# Allegro board CC1310LAUNCHPAD.brd
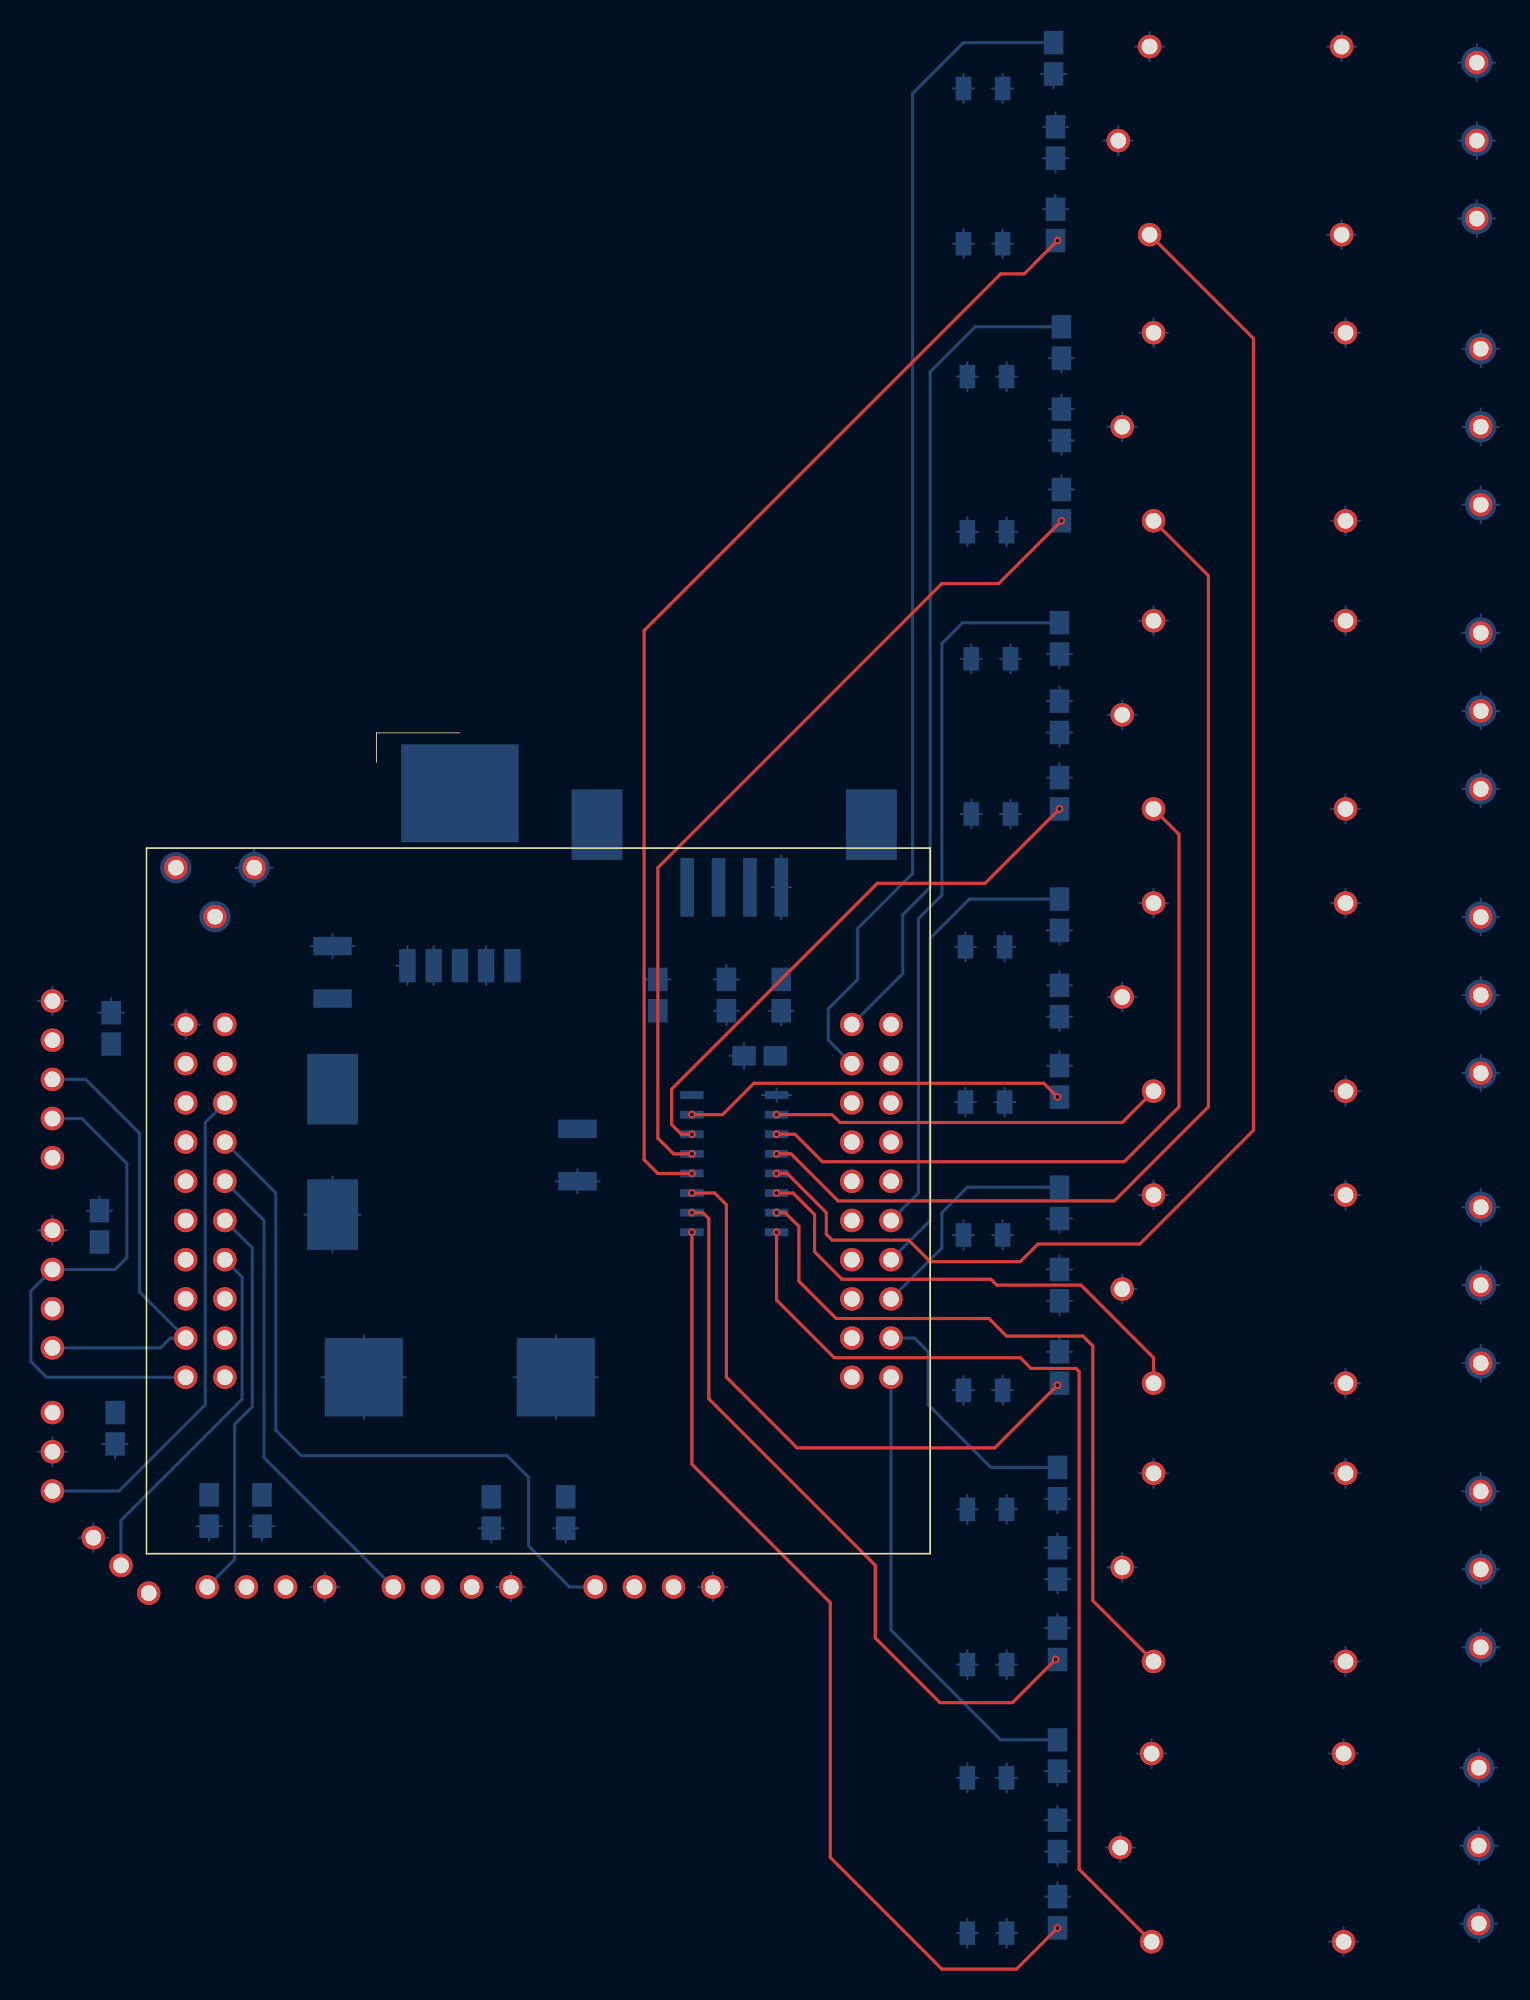
[diagram p0: board, top side]
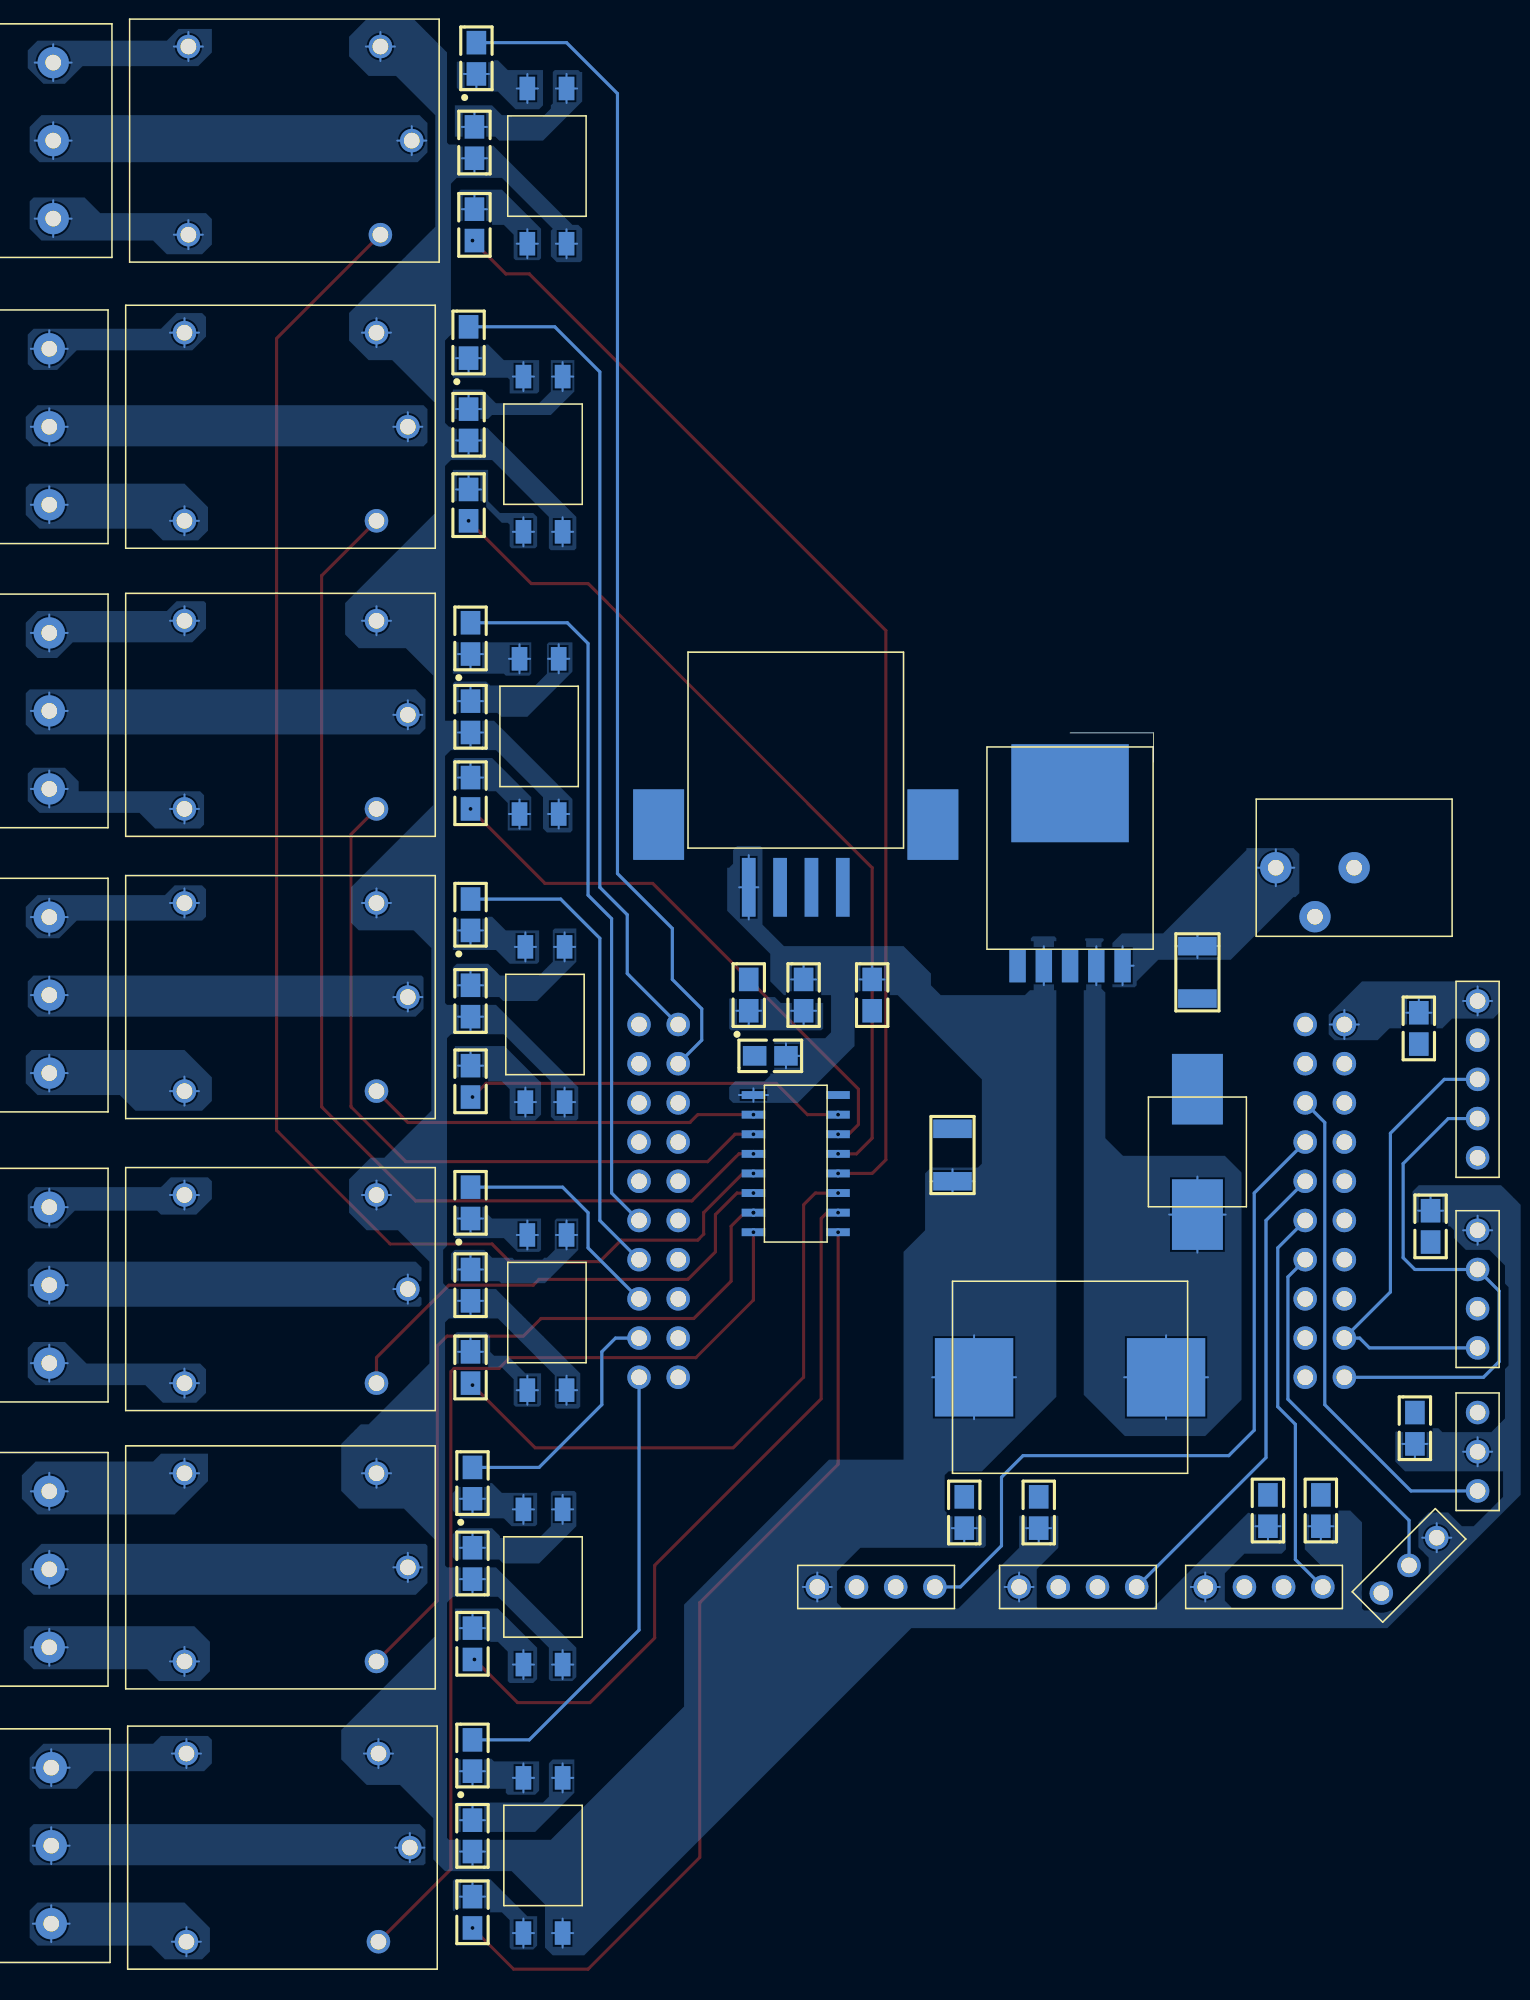
[diagram p1: board, bottom side, seen from below]

Outline 5.41 x 1.91 mm; copper layers: TOP, BOTTOM. Coordinates in mm from the lower left corner of the outline.

## Placement (name value [footprint] x y rotation side)
C1  0.1uF  [C0805]  -16.94 -43.15 180 bottom
C2  0.1uF  [C0805]  -17.96 -30.07 180 bottom
C3  10uF  [C0805]  18.24 -15.09 180 bottom
C4  0.1uF  [C0805]  -17.2 -17.25 180 bottom
C5  0.1uF  [C0805]  12.27 -48.62 0 bottom
C6  0.1uF  [C0805]  24.84 -19.02 90 bottom
C8  100uF  [C1210]  -2.84 -11.91 270 bottom
C9  100uF  [C1210]  13.03 -27.15 90 bottom
C10  0.1uF  [C0805]  -7.42 -48.49 0 bottom
C11  0.1uF  [C0805]  -10.85 -48.49 0 bottom
C12  0.1uF  [C0805]  7.44 -48.62 0 bottom
D1  LED  [D0805]  44.27 8.03 180 bottom
D5  LED  [D0805]  26.24 -15.09 180 bottom
D6  MBR360  [SS34]  -2.84 -25.25 270 bottom
D11  LED  [D0805]  44.27 -9.88 180 bottom
D12  LED  [D0805]  44.27 -28.55 180 bottom
D13  LED  [D0805]  44.15 -46.71 180 bottom
D14  LED  [D0805]  44.15 -64.36 180 bottom
D15  LED  [D0805]  44.4 27.2 180 bottom
D16  LED  [D0805]  43.89 45.62 180 bottom
J4  HEADER 3  [KF3013P]  71.45 -70.21 0 bottom
J5  HEADER 3  [KF3013P]  71.58 -52.3 0 bottom
J6  HEADER 3  [KF3013P]  71.58 -33.88 0 bottom
J7  HEADER 3  [KF3013P]  71.32 40.28 0 bottom
J8  HEADER 3  [KF3013P]  71.58 21.74 0 bottom
J10  HEADER 3  [KF3013P]  71.58 -15.09 0 bottom
J11  HEADER 3  [KF3013P]  71.58 3.33 0 bottom
L1  47uH  [RH127]  5.41 -39.85 0 bottom
LS1  RELAY SPDT  [HK33F]  56.46 -70.33 180 bottom
LS2  RELAY SPDT  [HK33F]  56.59 -52.17 180 bottom
LS3  RELAY SPDT  [HK33F]  56.59 -34.14 180 bottom
LS4  RELAY SPDT  [HK33F]  56.59 21.74 180 bottom
LS5  RELAY SPDT  [HK33F]  56.34 40.28 180 bottom
LS6  RELAY SPDT  [HK33F]  56.59 -15.21 180 bottom
LS7  RELAY SPDT  [HK33F]  56.59 3.07 180 bottom
R5  220 Ohm  [R0805]  22.68 -15.09 180 bottom
R12  1k Ohm  [R0805]  44.27 2.95 0 bottom
R13  1k Ohm  [R0805]  44.27 -15.47 0 bottom
R14  1k Ohm  [R0805]  44.27 -33.88 0 bottom
R15  1k Ohm  [R0805]  44.15 -51.92 0 bottom
R16  1k Ohm  [R0805]  44.15 -69.57 0 bottom
R17  1k Ohm  [R0805]  44.4 21.87 0 bottom
R18  1k Ohm  [R0805]  44.02 40.16 0 bottom
R20  1k Ohm  [R0805]  44.27 -2.01 180 bottom
R21  1k Ohm  [R0805]  44.27 -20.68 180 bottom
R22  1k Ohm  [R0805]  44.27 -39.22 180 bottom
R23  1k Ohm  [R0805]  44.15 -57.12 180 bottom
R24  1k Ohm  [R0805]  44.15 -74.52 180 bottom
R25  1k Ohm  [R0805]  44.4 16.66 180 bottom
R26  1k Ohm  [R0805]  44.02 34.82 180 bottom
U7  -  [ULN2003A]  23.19 -26.01 0 bottom
U8  -  [AM2320]  -21.01 -34.14 180 bottom
U9  bh1750  [BH1750]  -21.01 -20.55 180 bottom
U10  -  [LM393]  17.98 -53.44 90 bottom
U11  pH  [PH]  -21.01 -44.68 180 bottom
U12  CC1310LauchPad  [CC1310CONNECTOR]  10.49 -28.42 0 top
U13  LM2576HV-ADJ  [LM2576]  5.41 -5.56 270 bottom
U14  -  [LM393]  -7.16 -53.44 90 bottom
U15  -  [LM35]  -16.56 -52.04 225 bottom
U16  -  [LM393]  4.9 -53.44 90 bottom
U17  DC  [DC002POWER]  -13 -6.83 0 bottom
U18  -  [USB]  23.19 0.79 90 bottom
U21  PC817XxNiP0F  [PC817X2NIP0F]  39.83 1.68 270 bottom
U22  PC817XxNiP0F  [PC817X2NIP0F]  39.45 -16.99 270 bottom
U23  PC817XxNiP0F  [PC817X2NIP0F]  39.32 -35.66 270 bottom
U24  PC817XxNiP0F  [PC817X2NIP0F]  39.57 -53.44 270 bottom
U25  PC817XxNiP0F  [PC817X2NIP0F]  39.57 -70.84 270 bottom
U26  PC817XxNiP0F  [PC817X2NIP0F]  39.57 19.96 270 bottom
U27  PC817XxNiP0F  [PC817X2NIP0F]  39.32 38.63 270 bottom

## Library data of the parts
C1-C6 C10-C12 = CAP NP
C8 C9 = CAP POL
D1 D5 D11-D16 = LED
D6 = DIODE SCHOTTKY
J4-J8 J10 J11 = HEADER 3
L1 = INDUCTOR
LS1-LS7 = RELAY SPDT
R5 R12-R18 R20-R26 = RESISTOR
U7 = ULN2003A
U8 = AM2320
U9 = bh1750
U10 U14 U16 = LM393
U11 = pH
U12 = CC1310LaouchPad
U13 = LM2576HV-ADJ
U15 = LM35
U17 = DC002
U18 = USB
U21-U27 = PC817XxNiP0F

## Footprints (pads in the part's own frame, mm; a bottom-side part is the same pattern mirrored in y, then rotated)
AM2320
  round 1.524 hole 1.016: 1(0,3.81) 2(0,1.27) 3(0,-1.27) 4(0,-3.81)
BH1750
  round 1.524 hole 1.016: 1(0,5.08) 2(0,2.54) 3(0,0) 4(0,-2.54) 5(0,-5.08)
C0805
  rect 1.27x1.524 smd: 1(0,1.016) 2(0,-1.016)
C1210
  rect 1.2x2.5 smd: 1(0,0) 2(3.4,0)
CC1310CONNECTOR
  round 1.524 hole 1.016: 1(-22.86,11.43) 2(-22.86,8.89) 3(-22.86,6.35) 4(-22.86,3.81) 5(-22.86,1.27) 6(-22.86,-1.27) 7(-22.86,-3.81) 8(-22.86,-6.35) 9(-22.86,-8.89) 10(-22.86,-11.43) 11(22.86,-11.43) 12(22.86,-8.89) 13(22.86,-6.35) 14(22.86,-3.81) 15(22.86,-1.27) 16(22.86,1.27) 17(22.86,3.81) 18(22.86,6.35) 19(22.86,8.89) 20(22.86,11.43) 21(-20.32,11.43) 22(-20.32,8.89) 23(-20.32,6.35) 24(-20.32,3.81) 25(-20.32,1.27) 26(-20.32,-1.27) 27(-20.32,-3.81) 28(-20.32,-6.35) 29(-20.32,-8.89) 30(-20.32,-11.43) 31(20.32,-11.43) 32(20.32,-8.89) 33(20.32,-6.35) 34(20.32,-3.81) 35(20.32,-1.27) 36(20.32,1.27) 37(20.32,3.81) 38(20.32,6.35) 39(20.32,8.89) 40(20.32,11.43)
D0805
  rect 1.27x1.524 smd: 1(0,1.016) 2(0,-1.016)
DC002POWER
  round 1.524 hole 1.016: 3(0,0) 4(5.08,0) 5(2.54,3.175)
HK33F
  round 1.524 hole 1.016: 1(6.223,6.096) 2(6.223,-6.096) 3(8.255,0) 4(-6.223,6.096) 5(-6.223,-6.096)
KF3013P
  round 1.524 hole 1.016: 1(0,5.055) 2(0,0) 3(0,-5.055)
LM35
  round 1.524 hole 1.016: 1(0,2.54) 2(0,0) 3(0,-2.54)
LM393
  round 1.524 hole 1.016: 1(0,3.81) 2(0,1.27) 3(0,-1.27) 4(0,-3.81)
LM2576
  rect 6.35x7.62 smd: (-3.556,0)
  rect 2.159x1.067 smd: 1(7.62,3.404) 2(7.62,1.702) 3(7.62,0) 4(7.62,-1.702) 5(7.62,-3.404)
PC817X2NIP0F
  rect 1.524x1.016 smd: 1(-5.029,1.27) 2(-5.029,-1.27) 3(5.029,-1.27) 4(5.029,1.27)
PH
  round 1.524 hole 1.016: 1(0,2.54) 2(0,0) 3(0,-2.54)
R0805
  rect 1.27x1.524 smd: 1(0,1.016) 2(0,-1.016)
RH127
  rect 5.08x5.08 smd: 1(-6.223,0) 2(6.223,0)
SS34
  rect 4.572x3.302 smd: 1(-4.064,0) 2(4.064,0)
ULN2003A
  rect 1.524x0.508 smd: 1(-2.743,4.445) 2(-2.743,3.175) 3(-2.743,1.905) 4(-2.743,0.635) 5(-2.743,-0.635) 6(-2.743,-1.905) 7(-2.743,-3.175) 8(-2.743,-4.445) 9(2.743,-4.445) 10(2.743,-3.175) 11(2.743,-1.905) 12(2.743,-0.635) 13(2.743,0.635) 14(2.743,1.905) 15(2.743,3.175) 16(2.743,4.445)
USB
  rect 4.572x3.302 smd: (-4.826,-8.89) (-4.826,8.89)
  rect 3.81x0.889 smd: 1(-8.89,3.048) 2(-8.89,1.016) 3(-8.89,-1.016) 4(-8.89,-3.048)

## Nets
3V3: C4.1 U9.1(VCC) U12.1(3V3)
5V: C1.2 C2.1 C3.1 C5.1 C6.2 C9.1 C10.1 C11.1 C12.1 L1.2 LS1.1(COIL1) LS2.1(COIL1) LS3.1(COIL1) LS4.1(COIL1) LS5.1(COIL1) LS6.1(COIL1) LS7.1(COIL1) R5.1 R12.1 R13.1 R14.1 R15.1 R16.1 R17.1 R18.1 U7.9(COM) U8.1(VDD) U10.1(VCC) U11.2(VCC) U13.4(FEEDBACK) U14.1(VCC) U15.1(VCC) U16.1(VCC) U18.1(VCC) U21.4(EMITTER) U22.4(EMITTER) U23.4(EMITTER) U24.4(EMITTER) U25.4(EMITTER) U26.4(EMITTER) U27.4(EMITTER)
GND: C1.1 C2.2 C3.2 C4.2 C5.2 C6.1 C8.2 C9.2 C10.2 C11.2 C12.2 D5.1(CATHODE) D6.1(ANODE) U7.8(E) U8.3(GND) U9.2(GND) U10.2(GND) U11.1(GND) U13.3(GND) U13.5(ON/OFF) U14.2(GND) U15.3(GND) U16.2(GND) U17.3(GND1) U17.5(GND2) U18.4(GND)
VCC: C8.1 U13.1(VIN) U17.4(VCC)
A: U12.21(5V)
N45672: D6.2(CATHODE) L1.1 U13.2(OUTPUT)
N45784: U8.4(SCL) U9.3(SCL) U12.9(DIO4 / I2C SCL)
N45822: U8.2(SDA) U9.4(SDA) U12.10(DIO5 / I2C SDA)
N45888: U12.25(DIO27 / A4) U16.4(AO)
N45956: LS2.2(COIL2) U7.15(2C)
N45960: LS3.2(COIL2) U7.14(3C)
N46040: LS7.2(COIL2) U7.11(6C)
N46052: LS6.2(COIL2) U7.10(7C)
N46056: J11.2 LS7.3(COMMON)
N46086: J11.1 LS7.5(NC)
N46098: J11.3 LS7.4(NO)
N46172: LS4.2(COIL2) U7.12(5C)
N46276: LS5.2(COIL2) U7.13(4C)
N47108: U11.3(AO) U12.23(DIO25 / A2)
N47294: J4.2 LS1.3(COMMON)
N47328: J4.1 LS1.5(NC)
N47344: J4.3 LS1.4(NO)
N47364: J5.2 LS2.3(COMMON)
N47376: J5.1 LS2.5(NC)
N47410: J5.3 LS2.4(NO)
N47434: J6.2 LS3.3(COMMON)
N47472: J6.1 LS3.5(NC)
N47484: J6.3 LS3.4(NO)
N47508: J7.2 LS5.3(COMMON)
N47520: J7.1 LS5.5(NC)
N47550: J7.3 LS5.4(NO)
N47574: J8.2 LS4.3(COMMON)
N47604: J8.1 LS4.5(NC)
N47616: J8.3 LS4.4(NO)
N47728: J10.2 LS6.3(COMMON)
N47740: J10.1 LS6.5(NC)
N47770: J10.3 LS6.4(NO)
N59569: U12.26(DIO28 / A5) U14.4(AO)
N60079: U12.27(DIO29 / A6) U15.2(OUT)
N60108: U10.4(AO) U12.24(DIO26 / A3)
N64930: LS1.2(COIL2) U7.16(1C)
N72485: R12.2 U21.1(ANODE)
N72769: R13.2 U22.1(ANODE)
N73065: R14.2 U23.1(ANODE)
N73365: R15.2 U24.1(ANODE)
N73669: R16.2 U25.1(ANODE)
N74807: D1.1(CATHODE) U12.15(DIO9 / MOSI)
N74854: D11.1(CATHODE) U12.14(DIO8 / MISO)
N74907: D12.1(CATHODE) U12.13(DIO13 / BTN1)
N74952: D13.1(CATHODE) U12.12(DIO14 / BTN2)
N74990: D14.2(ANODE) U25.2(CATHODE)
N74994: D14.1(CATHODE) U12.11(DIO15)
N75036: D15.1(CATHODE) U12.40(DIO7 / GRN LED)
N75078: D16.1(CATHODE) U12.39(DIO8 / RED LED)
N76545: R20.1 U21.3(COLLECTOR)
N76560: R21.1 U22.3(COLLECTOR)
N76587: R22.1 U23.3(COLLECTOR)
N76621: R23.1 U24.3(COLLECTOR)
N76655: R24.1 U25.3(COLLECTOR)
N87792: D1.2(ANODE) U21.2(CATHODE)
N88579: D11.2(ANODE) U22.2(CATHODE)
N89000: D12.2(ANODE) U23.2(CATHODE)
N89401: D13.2(ANODE) U24.2(CATHODE)
N90793: R17.2 U26.1(ANODE)
N91085: D15.2(ANODE) U26.2(CATHODE)
N91216: R25.1 U26.3(COLLECTOR)
N91679: R18.2 U27.1(ANODE)
N91683: D16.2(ANODE) U27.2(CATHODE)
N91836: R26.1 U27.3(COLLECTOR)
N91946: R26.2 U7.4(4B)
N91982: R20.2 U7.6(6B)
N92026: R21.2 U7.7(7B)
N92057: R25.2 U7.5(5B)
N93559: R22.2 U7.3(3B)
N93563: R23.2 U7.2(2B)
N93738: R24.2 U7.1(1B)
N478560: D5.2(ANODE) R5.2

Pads without a net: U9 5; U10 3; U12 2 3 4 5 6 7 8 16 17 18 19 20 22 28 29 30 31 32 33 34 35 36 37 38; U14 3; U16 3; U18 2 3

## Via types
v1: diameter 0.508, hole 0.254, TOP to BOTTOM, 22 vias

## Routing (per net, layer and track width the routed paths; a pad name or vN(x,y) marks a point on that pad's centre or on a via; arc(x,y) is an arc through that point)
3V3: length 10.1
  BOTTOM w0.127: -21.95,-15.47 U9.1 ; U9.1 -21.01,-16.41 ; U9.1 -20.07,-15.47 ; U9.1 -21.01,-14.53 ; C4.1 -16.38,-16.23 ; C4.1 -17.2,-15.29 ; C4.1 -18.01,-16.23 ; U12.1 -11.43,-16.99 ; U12.1 -12.37,-16.05 ; U12.1 -13.31,-16.99 ; U12.1 -12.37,-17.93
5V: length 138.7
  BOTTOM w0.127: U7.9 26.87,-21.56 ; U7.9 24.99,-21.56 ; U7.9 25.93,-21.13 ; U7.9 25.93,-22 ; -18.36,-51.19 U15.1 ; U15.1 -19.3,-50.25 ; U15.1 -17.42,-50.25 ; U15.1 -18.36,-49.31 ; 20.85,-53.44 U10.1 ; U10.1 21.79,-54.38 ; U10.1 21.79,-52.5 ; U10.1 22.73,-53.44 ; U21.4 39.24,-3.35 ; U21.4 38.56,-2.41 ; U21.4 37.87,-3.35 ; U21.4 38.56,-4.29 ; 18.24,-14.07 19.05,-14.07 ; 18.24,-14.07 18.24,-13.13 ; 18.24,-14.07 17.42,-14.07 ; -8.23,-49.5 C10.1 ; C10.1 -6.6,-49.5 ; C10.1 -7.42,-50.44 ; -21.95,-30.33 U8.1 ; U8.1 -21.01,-29.39 ; U8.1 -21.01,-31.27 ; U8.1 -20.07,-30.33 ; LS2.1 51.31,-46.08 ; LS2.1 50.37,-47.02 ; LS2.1 50.37,-45.14 ; LS2.1 49.43,-46.08 ; 22.68,-14.07 22.68,-13.13 ; 22.68,-14.07 23.5,-14.07 ; 22.68,-14.07 21.87,-14.07 ; 23.83,-19.84 23.83,-19.02 ; 23.83,-19.02 23.83,-18.21 ; 23.83,-19.02 22.88,-19.02 ; 37.36,33.6 U27.4 ; U27.4 38.05,32.66 ; U27.4 38.74,33.6 ; U27.4 38.05,34.54 ; 37.62,-58.47 U24.4 ; U24.4 38.99,-58.47 ; U24.4 38.3,-59.41 ; U24.4 38.3,-57.53 ; 50.24,-65.18 50.24,-64.24 ; 50.24,-64.24 49.3,-64.24 ; 50.24,-64.24 51.18,-64.24 ; 50.24,-64.24 50.24,-63.3 ; C5.1 13.08,-49.63 ; C5.1 12.27,-50.57 ; C5.1 11.45,-49.63 ; -21.01,-45.62 U11.2 ; U11.2 -21.95,-44.68 ; U11.2 -21.01,-43.74 ; U11.2 -20.07,-44.68 ; R18.1 44.83,39.14 ; R18.1 44.02,38.2 ; R18.1 43.2,39.14 ; LS6.1 51.31,-9.12 ; LS6.1 50.37,-10.06 ; LS6.1 49.43,-9.12 ; LS6.1 50.37,-8.18 ; -11.66,-49.5 C11.1 ; C11.1 -10.03,-49.5 ; C11.1 -10.85,-50.44 ; 7.11,-11.92 U13.4 7.11,-14.44 ; 38.3,13.99 U26.4 ; U26.4 38.3,15.88 ; U26.4 37.62,14.94 ; U26.4 38.99,14.94 ; 13.03,-27.93 C9.1 ; C9.1 13.03,-26.37 ; C9.1 14.46,-27.15 ; C9.1 11.6,-27.15 ; -18.77,-29.06 C2.1 ; C2.1 -17.14,-29.06 ; C2.1 -17.96,-28.12 ; L1.2 11.63,-37.13 ; L1.2 14.35,-39.85 ; L1.2 8.91,-39.85 ; L1.2 11.63,-42.57 ; 37.62,-75.87 U25.4 ; U25.4 38.99,-75.87 ; U25.4 38.3,-76.81 ; U25.4 38.3,-74.93 ; 50.37,8.23 LS7.1 ; LS7.1 50.37,10.11 ; LS7.1 49.43,9.17 ; LS7.1 51.31,9.17 ; U22.4 38.18,-21.08 ; U22.4 38.18,-22.96 ; U22.4 37.49,-22.02 ; U22.4 38.86,-22.02 ; 43.46,-16.48 R13.1 ; R13.1 44.27,-17.42 ; R13.1 45.09,-16.48 ; 43.46,-34.9 R14.1 ; R14.1 45.09,-34.9 ; R14.1 44.27,-35.84 ; 44.27,0.99 R12.1 ; R12.1 45.09,1.93 ; R12.1 43.46,1.93 ; -4.29,-53.44 U14.1 ; U14.1 -3.35,-54.38 ; U14.1 -2.41,-53.44 ; U14.1 -3.35,-52.5 ; 44.15,-53.87 44.15,-52.93 ; 44.15,-52.93 44.96,-52.93 ; 44.15,-52.93 43.33,-52.93 ; 37.36,-40.69 U23.4 ; U23.4 38.05,-41.63 ; U23.4 38.74,-40.69 ; U23.4 38.05,-39.75 ; U18.1 26.86,-8.1 ; U18.1 26.24,-10.19 ; U18.1 25.62,-8.1 ; U18.1 26.24,-6.02 ; LS4.1 51.31,27.84 ; LS4.1 50.37,26.9 ; LS4.1 50.37,28.78 ; LS4.1 49.43,27.84 ; 8.71,-54.38 U16.1 ; U16.1 9.65,-53.44 ; U16.1 8.71,-52.5 ; U16.1 7.77,-53.44 ; C1.2 -16.13,-44.17 ; C1.2 -17.76,-44.17 ; C1.2 -16.94,-45.11 ; 44.4,19.91 R17.1 ; R17.1 43.59,20.85 ; R17.1 45.21,20.85 ; 6.63,-49.63 C12.1 ; C12.1 8.26,-49.63 ; C12.1 7.44,-50.57 ; LS3.1 50.37,-27.1 ; LS3.1 50.37,-28.98 ; LS3.1 49.43,-28.04 ; LS3.1 51.31,-28.04 ; R16.1 44.96,-70.59 ; R16.1 43.33,-70.59 ; R16.1 44.15,-71.53 ; 50.11,45.44 LS5.1 ; LS5.1 50.11,47.32 ; LS5.1 51.05,46.38 ; LS5.1 49.17,46.38
VCC: length 12.4
  BOTTOM w0.127: U13.1 2.01,-11.92 ; U13.1 1.29,-13.18 ; U13.1 2.01,-14.44 ; C8.1 -2.84,-11.13 ; C8.1 -1.42,-11.91 ; C8.1 -2.84,-12.69 ; C8.1 -4.27,-11.91 ; U17.4 -6.73,-6.83 ; U17.4 -7.92,-8.03 ; U17.4 -9.12,-6.83 ; U17.4 -7.92,-5.64
N45672: length 22
  BOTTOM w0.127: 3.71,-14.44 U13.2 3.71,-11.92 ; D6.2 -2.84,-26.85 ; D6.2 -1.02,-29.31 ; D6.2 -4.67,-29.31 ; D6.2 -2.84,-31.78 ; L1.1 -0.81,-37.13 ; L1.1 -3.53,-39.85 ; L1.1 1.91,-39.85 ; L1.1 -0.81,-42.57
N45784: length 30.5
  BOTTOM w0.203: U8.4 -14,-37.95 -13.36,-37.31 U12.9 -15.35,-34.33 -15.35,-24.04 -18.85,-20.55 U9.3
N45822: length 34.3
  BOTTOM w0.203: U12.10 -21.39,-39.85 -22.4,-38.84 -22.4,-34.26 U8.2 -16.94,-32.87 -16.18,-32.11 -16.18,-26.01 -19.1,-23.09 U9.4
N45888: length 30.8
  BOTTOM w0.203: U16.4 -7.29,-45.06 -7.29,-29.69 U12.25
N45956: length 48.2
  TOP w0.203: LS2.2 46.43,-54.33 46.43,-37.82 45.8,-37.19 40.84,-37.19 39.7,-36.04 29.79,-36.04 27.38,-33.63 27.38,-30.07 26.49,-29.18 v1(25.93,-29.18)
N45960: length 31.9
  TOP w0.203: v1(25.93,-27.91) 27,-27.91 28.4,-29.31 28.4,-31.72 30.18,-33.5 39.83,-33.5 40.21,-33.88 45.67,-33.88 50.37,-38.58 LS3.2
N46040: length 48.3
  TOP w0.203: v1(25.93,-24.1) 27.13,-24.1 28.91,-25.88 48.46,-25.88 52.02,-22.33 52.02,-4.67 LS7.2
N46052: length 25.5
  TOP w0.203: v1(25.93,-22.83) 29.54,-22.83 30.05,-23.34 48.34,-23.34 LS6.2
N46056: length 8.5
  BOTTOM w0.127: J11.2 71.58,4.52 ; J11.2 70.38,3.33 ; J11.2 71.58,2.13 ; J11.2 72.77,3.33 ; 47.4,3.07 LS7.3 ; LS7.3 48.34,2.13 ; LS7.3 48.34,4.01 ; LS7.3 49.28,3.07
N46086: length 8.5
  BOTTOM w0.127: 71.58,-2.92 J11.1 ; J11.1 71.58,-0.53 ; J11.1 72.77,-1.73 ; J11.1 70.38,-1.73 ; 61.87,-3.02 LS7.5 ; LS7.5 62.81,-2.08 ; LS7.5 63.75,-3.02 ; LS7.5 62.81,-3.96
N46098: length 8.5
  BOTTOM w0.127: 61.87,9.17 LS7.4 ; LS7.4 62.81,10.11 ; LS7.4 63.75,9.17 ; LS7.4 62.81,8.23 ; 70.38,8.38 J11.3 ; J11.3 71.58,7.19 ; J11.3 72.77,8.38 ; J11.3 71.58,9.58
N46172: length 71.2
  TOP w0.203: v1(25.93,-25.37) 26.87,-25.37 29.92,-28.42 47.83,-28.42 53.92,-22.33 53.92,12.09 LS4.2
N46276: length 98.4
  TOP w0.203: LS5.2 56.85,27.46 56.85,-23.85 49.48,-31.22 42.88,-31.22 41.73,-32.36 35.89,-32.36 34.49,-30.96 29.54,-30.96 29.16,-30.58 29.16,-29.18 26.62,-26.64 v1(25.93,-26.64)
N47108: length 32.3
  BOTTOM w0.203: U12.23 -11.1,-23.34 -11.1,-41.63 -16.69,-47.22 U11.3
N47294: length 8.5
  BOTTOM w0.127: J4.2 71.45,-69.01 ; J4.2 72.64,-70.21 ; J4.2 71.45,-71.4 ; J4.2 70.26,-70.21 ; 48.21,-71.27 LS1.3 ; LS1.3 49.15,-70.33 ; LS1.3 47.27,-70.33 ; LS1.3 48.21,-69.39
N47328: length 8.5
  BOTTOM w0.127: 62.69,-77.37 LS1.5 ; LS1.5 61.75,-76.43 ; LS1.5 63.63,-76.43 ; LS1.5 62.69,-75.49 ; J4.1 71.45,-74.07 ; J4.1 71.45,-76.45 ; J4.1 72.64,-75.26 ; J4.1 70.26,-75.26
N47344: length 8.5
  BOTTOM w0.127: J4.3 71.45,-63.96 ; J4.3 71.45,-66.35 ; J4.3 70.26,-65.15 ; J4.3 72.64,-65.15 ; 62.69,-65.18 LS1.4 ; LS1.4 61.75,-64.24 ; LS1.4 63.63,-64.24 ; LS1.4 62.69,-63.3
N47364: length 8.5
  BOTTOM w0.127: 70.38,-52.3 J5.2 ; J5.2 71.58,-53.49 ; J5.2 71.58,-51.1 ; J5.2 72.77,-52.3 ; LS2.3 49.28,-52.17 ; LS2.3 47.4,-52.17 ; LS2.3 48.34,-53.11 ; LS2.3 48.34,-51.23
N47376: length 8.5
  BOTTOM w0.127: 70.38,-57.35 J5.1 ; J5.1 72.77,-57.35 ; J5.1 71.58,-58.55 ; J5.1 71.58,-56.16 ; 61.87,-58.27 LS2.5 ; LS2.5 63.75,-58.27 ; LS2.5 62.81,-57.33 ; LS2.5 62.81,-59.21
N47410: length 8.5
  BOTTOM w0.127: 62.81,-47.02 LS2.4 ; LS2.4 63.75,-46.08 ; LS2.4 62.81,-45.14 ; LS2.4 61.87,-46.08 ; 71.58,-48.44 J5.3 ; J5.3 72.77,-47.24 ; J5.3 70.38,-47.24 ; J5.3 71.58,-46.05
N47434: length 7.6
  BOTTOM w0.127: 70.38,-33.88 J6.2 ; J6.2 72.77,-33.88 ; J6.2 71.58,-35.08 ; J6.2 71.58,-32.69 ; 48.34,-35.08 LS3.3 ; LS3.3 49.28,-34.14 ; LS3.3 48.34,-33.2
N47472: length 8.5
  BOTTOM w0.127: 71.58,-40.13 J6.1 ; J6.1 71.58,-37.74 ; J6.1 70.38,-38.94 ; J6.1 72.77,-38.94 ; 61.87,-40.23 LS3.5 ; LS3.5 62.81,-39.29 ; LS3.5 63.75,-40.23 ; LS3.5 62.81,-41.17
N47484: length 8.5
  BOTTOM w0.127: LS3.4 63.75,-28.04 ; LS3.4 62.81,-28.98 ; LS3.4 61.87,-28.04 ; LS3.4 62.81,-27.1 ; J6.3 71.58,-27.63 ; J6.3 71.58,-30.02 ; J6.3 72.77,-28.83 ; J6.3 70.38,-28.83
N47508: length 8.5
  BOTTOM w0.127: J7.2 72.52,40.28 ; J7.2 70.13,40.28 ; J7.2 71.32,41.48 ; J7.2 71.32,39.09 ; 47.14,40.28 LS5.3 ; LS5.3 48.08,41.22 ; LS5.3 48.08,39.34 ; LS5.3 49.02,40.28
N47520: length 8.5
  BOTTOM w0.127: 70.13,35.23 J7.1 ; J7.1 72.52,35.23 ; J7.1 71.32,36.42 ; J7.1 71.32,34.04 ; 62.56,33.25 LS5.5 ; LS5.5 61.62,34.19 ; LS5.5 63.5,34.19 ; LS5.5 62.56,35.13
N47550: length 8.5
  BOTTOM w0.127: J7.3 71.32,46.53 ; J7.3 71.32,44.14 ; J7.3 72.52,45.34 ; J7.3 70.13,45.34 ; 62.56,45.44 LS5.4 ; LS5.4 62.56,47.32 ; LS5.4 61.62,46.38 ; LS5.4 63.5,46.38
N47574: length 8.5
  BOTTOM w0.127: 71.58,20.55 J8.2 ; J8.2 70.38,21.74 ; J8.2 71.58,22.94 ; J8.2 72.77,21.74 ; 48.34,20.8 LS4.3 ; LS4.3 48.34,22.68 ; LS4.3 47.4,21.74 ; LS4.3 49.28,21.74
N47604: length 8.5
  BOTTOM w0.127: 70.38,16.69 J8.1 ; J8.1 71.58,17.88 ; J8.1 72.77,16.69 ; J8.1 71.58,15.49 ; 62.81,14.71 LS4.5 ; LS4.5 63.75,15.65 ; LS4.5 62.81,16.59 ; LS4.5 61.87,15.65
N47616: length 8.5
  BOTTOM w0.127: 70.38,26.8 J8.3 ; J8.3 71.58,27.99 ; J8.3 71.58,25.6 ; J8.3 72.77,26.8 ; 62.81,26.9 LS4.4 ; LS4.4 61.87,27.84 ; LS4.4 63.75,27.84 ; LS4.4 62.81,28.78
N47728: length 8.5
  BOTTOM w0.127: LS6.3 48.34,-14.27 ; LS6.3 49.28,-15.21 ; LS6.3 48.34,-16.15 ; LS6.3 47.4,-15.21 ; J10.2 72.77,-15.09 ; J10.2 70.38,-15.09 ; J10.2 71.58,-16.28 ; J10.2 71.58,-13.89
N47740: length 8.5
  BOTTOM w0.127: LS6.5 63.75,-21.31 ; LS6.5 61.87,-21.31 ; LS6.5 62.81,-22.25 ; LS6.5 62.81,-20.37 ; 71.58,-21.34 J10.1 ; J10.1 71.58,-18.95 ; J10.1 72.77,-20.14 ; J10.1 70.38,-20.14
N47770: length 8.5
  BOTTOM w0.127: 61.87,-9.12 LS6.4 ; LS6.4 63.75,-9.12 ; LS6.4 62.81,-8.18 ; LS6.4 62.81,-10.06 ; J10.3 72.77,-10.03 ; J10.3 71.58,-8.84 ; J10.3 70.38,-10.03 ; J10.3 71.58,-11.23
N59569: length 25.7
  BOTTOM w0.203: U14.4 -9.19,-51.66 -9.19,-42.9 -8.05,-41.76 -8.05,-31.47 U12.26
N60079: length 23.5
  BOTTOM w0.203: U15.2 -16.56,-49.12 -8.71,-41.27 -8.71,-33.35 U12.27
N60108: length 47.5
  BOTTOM w0.203: U12.24 -6.53,-27.91 -6.53,-43.28 -4.88,-44.93 8.46,-44.93 9.86,-46.33 9.86,-50.77 12.52,-53.44 U10.4
N64930: length 64.8
  TOP w0.203: 50.24,-76.43 45.54,-71.73 45.54,-39.48 45.34,-39.28 42.43,-39.28 41.73,-38.58 29.67,-38.58 25.93,-34.85 v1(25.93,-30.45)
N72485: length 5.8
  BOTTOM w0.127: R12.2 44.27,4.9 ; R12.2 45.09,3.96 ; R12.2 43.46,3.96 ; U21.1 38.56,7.65 ; U21.1 39.24,6.71 ; U21.1 37.87,6.71 ; U21.1 38.56,5.77
N72769: length 5.8
  BOTTOM w0.127: U22.1 38.18,-11.02 ; U22.1 37.49,-11.96 ; U22.1 38.18,-12.9 ; U22.1 38.86,-11.96 ; R13.2 45.09,-14.45 ; R13.2 44.27,-13.51 ; R13.2 43.46,-14.45
N73065: length 5.8
  BOTTOM w0.127: U23.1 38.74,-30.63 ; U23.1 38.05,-31.57 ; U23.1 38.05,-29.69 ; U23.1 37.36,-30.63 ; 43.46,-32.87 R14.2 ; R14.2 44.27,-31.93 ; R14.2 45.09,-32.87
N73365: length 5.8
  BOTTOM w0.127: 38.3,-49.35 U24.1 ; U24.1 38.3,-47.47 ; U24.1 38.99,-48.41 ; U24.1 37.62,-48.41 ; R15.2 44.96,-50.9 ; R15.2 43.33,-50.9 ; R15.2 44.15,-49.96
N73669: length 5.8
  BOTTOM w0.127: 37.62,-65.81 U25.1 ; U25.1 38.3,-66.75 ; U25.1 38.99,-65.81 ; U25.1 38.3,-64.87 ; R16.2 44.15,-67.61 ; R16.2 43.33,-68.55 ; R16.2 44.96,-68.55
N74807: length 46.9
  BOTTOM w0.203: D1.1 38,9.04 36.65,7.7 36.65,-8.61 35.13,-10.13 35.13,-27.91 U12.15
N74854: length 31.3
  BOTTOM w0.203: U12.14 35.89,-29.69 35.89,-11.4 38.43,-8.86 D11.1
N74907: length 15.3
  BOTTOM w0.203: D12.1 38.3,-27.53 36.65,-29.18 36.65,-31.47 U12.13
N74952: length 16.3
  BOTTOM w0.203: D13.1 39.83,-45.69 35.76,-41.63 35.76,-38.2 34.87,-37.31 U12.12
N74990: length 5.8
  BOTTOM w0.127: 40.84,-66.75 U25.2 ; U25.2 41.53,-65.81 ; U25.2 40.84,-64.87 ; U25.2 40.16,-65.81 ; 43.33,-65.38 D14.2 ; D14.2 44.96,-65.38 ; D14.2 44.15,-66.32
N74994: length 30.1
  BOTTOM w0.203: U12.11 33.35,-56.24 40.46,-63.35 44.15,-63.35
N75036: length 54.1
  BOTTOM w0.203: U12.40 34.11,-13.69 34.11,-9.88 35.89,-8.1 35.89,25.3 38.81,28.22 D15.1
N75078: length 76.3
  BOTTOM w0.203: U12.39 29.29,-18.01 29.29,-15.98 31.19,-14.07 31.19,-10.77 34.75,-7.21 34.75,43.33 38.05,46.63 D16.1
N76545: length 5.8
  BOTTOM w0.127: 41.1,-3.35 41.78,-3.35 ; 41.1,-3.35 40.41,-3.35 ; 41.1,-3.35 41.1,-4.29 ; 41.1,-3.35 41.1,-2.41 ; 43.46,-0.99 R20.1 ; R20.1 45.09,-0.99 ; R20.1 44.27,-0.05
N76560: length 5.8
  BOTTOM w0.127: U22.3 41.4,-22.02 ; U22.3 40.72,-21.08 ; U22.3 40.72,-22.96 ; U22.3 40.03,-22.02 ; 43.46,-19.66 R21.1 ; R21.1 45.09,-19.66 ; R21.1 44.27,-18.72
N76587: length 5.8
  BOTTOM w0.127: R22.1 45.09,-38.2 ; R22.1 43.46,-38.2 ; R22.1 44.27,-37.26 ; U23.3 40.59,-39.75 ; U23.3 39.9,-40.69 ; U23.3 40.59,-41.63 ; U23.3 41.28,-40.69
N76621: length 5.8
  BOTTOM w0.127: 40.16,-58.47 U24.3 ; U24.3 41.53,-58.47 ; U24.3 40.84,-57.53 ; U24.3 40.84,-59.41 ; 43.33,-56.11 R23.1 ; R23.1 44.96,-56.11 ; R23.1 44.15,-55.17
N76655: length 5.8
  BOTTOM w0.127: 43.33,-73.51 R24.1 ; R24.1 44.96,-73.51 ; R24.1 44.15,-72.57 ; U25.3 41.53,-75.87 ; U25.3 40.84,-76.81 ; U25.3 40.84,-74.93 ; U25.3 40.16,-75.87
N87792: length 5.8
  BOTTOM w0.127: 41.1,5.77 41.1,6.71 ; 41.1,6.71 40.41,6.71 ; 41.1,6.71 41.78,6.71 ; 41.1,6.71 41.1,7.65 ; 43.46,7.01 D1.2 ; D1.2 44.27,6.07 ; D1.2 45.09,7.01
N88579: length 5.8
  BOTTOM w0.127: U22.2 41.4,-11.96 ; U22.2 40.72,-11.02 ; U22.2 40.03,-11.96 ; U22.2 40.72,-12.9 ; 44.27,-11.84 D11.2 ; D11.2 43.46,-10.9 ; D11.2 45.09,-10.9
N89000: length 5.8
  BOTTOM w0.127: 39.9,-30.63 U23.2 ; U23.2 40.59,-31.57 ; U23.2 40.59,-29.69 ; U23.2 41.28,-30.63 ; 43.46,-29.57 44.27,-29.57 ; 44.27,-29.57 45.09,-29.57 ; 44.27,-29.57 44.27,-30.51
N89401: length 5.8
  BOTTOM w0.127: 40.84,-49.35 U24.2 ; U24.2 41.53,-48.41 ; U24.2 40.84,-47.47 ; U24.2 40.16,-48.41 ; 44.15,-48.67 D13.2 ; D13.2 43.33,-47.73 ; D13.2 44.96,-47.73
N90793: length 5.8
  BOTTOM w0.127: 37.62,24.99 U26.1 ; U26.1 38.99,24.99 ; U26.1 38.3,24.05 ; U26.1 38.3,25.93 ; R17.2 45.21,22.89 ; R17.2 43.59,22.89 ; R17.2 44.4,23.83
N91085: length 5.8
  BOTTOM w0.127: U26.2 40.84,25.93 ; U26.2 41.53,24.99 ; U26.2 40.16,24.99 ; U26.2 40.84,24.05 ; D15.2 45.21,26.19 ; D15.2 43.59,26.19 ; D15.2 44.4,25.25
N91216: length 5.8
  BOTTOM w0.127: 40.16,14.94 U26.3 ; U26.3 41.53,14.94 ; U26.3 40.84,13.99 ; U26.3 40.84,15.88 ; R25.1 44.4,18.62 ; R25.1 45.21,17.68 ; R25.1 43.59,17.68
N91679: length 5.8
  BOTTOM w0.127: U27.1 38.74,43.66 ; U27.1 38.05,42.72 ; U27.1 38.05,44.6 ; U27.1 37.36,43.66 ; R18.2 44.83,41.17 ; R18.2 44.02,42.11 ; R18.2 43.2,41.17
N91683: length 5.8
  BOTTOM w0.127: 43.89,43.66 43.89,44.6 ; 43.89,44.6 44.7,44.6 ; 43.89,44.6 43.08,44.6 ; 39.9,43.66 U27.2 ; U27.2 40.59,42.72 ; U27.2 41.28,43.66 ; U27.2 40.59,44.6
N91836: length 5.8
  BOTTOM w0.127: 40.59,32.66 U27.3 ; U27.3 41.28,33.6 ; U27.3 40.59,34.54 ; U27.3 39.9,33.6 ; R26.1 44.83,35.84 ; R26.1 44.02,36.78 ; R26.1 43.2,35.84
N91946: length 75
  TOP w0.203: v1(44.15,33.81) 41.99,31.65 40.46,31.65 17.35,8.53 17.35,-25.76 18.24,-26.64 v1(20.45,-26.64)
N91982: length 36.5
  TOP w0.203: v1(44.27,-3.02) 39.45,-7.85 32.46,-7.85 19.13,-21.18 19.13,-23.47 19.76,-24.1 v1(20.45,-24.1)
N92026: length 24.9
  TOP w0.203: v1(20.45,-22.83) 22.43,-22.83 24.46,-20.8 43.26,-20.8 v1(44.15,-21.69)
N92057: length 55.6
  TOP w0.203: v1(44.4,15.65) 40.34,11.58 36.65,11.58 18.24,-6.83 18.24,-24.36 19.25,-25.37 v1(20.45,-25.37)
N93559: length 38.8
  TOP w0.203: v1(20.45,-27.91) 21.92,-27.91 22.68,-28.68 22.68,-39.85 27.25,-44.42 40.08,-44.42 v1(44.15,-40.36)
N93563: length 47.5
  TOP w0.203: v1(20.45,-29.18) 21.16,-29.18 21.54,-29.57 21.54,-41.25 32.33,-52.04 32.33,-56.74 36.53,-60.93 41.22,-60.93 v1(44.02,-58.14)
N93738: length 63.1
  TOP w0.203: v1(44.15,-75.54) 41.48,-78.21 36.65,-78.21 29.41,-70.97 29.41,-54.46 20.45,-45.49 v1(20.45,-30.45)
N478560: length 5.1
  BOTTOM w0.127: 22.68,-17.04 R5.2 ; R5.2 23.5,-16.1 ; R5.2 21.87,-16.1 ; 26.24,-17.04 D5.2 ; D5.2 25.42,-16.1 ; D5.2 27.05,-16.1

## Copper pours and planes (outline as drawn; the poured copper is in the pictures)
3V3 on BOTTOM: -22.4,-14.2 -13.51,-14.2 -11.35,-16.36 -11.35,-17.63 -11.73,-18.01 -14.53,-18.01 -15.29,-17.25 -18.72,-17.25 -19.35,-16.61 -22.02,-16.61 -22.4,-16.23
5V on BOTTOM: outline of 265 points within -23.8,-77.32 52.65,48.16
VCC on BOTTOM: -9.07,-8.74 -5,-12.8 -0.3,-12.8 1.09,-14.2 1.09,-14.45 1.22,-14.58 2.74,-14.58 2.87,-14.45 2.87,-11.91 2.04,-11.09 -0.62,-11.09 -6.02,-5.69 -6.02,-5.56 -9.07,-5.56 -9.45,-5.94 -9.45,-8.48 -9.19,-8.74
N45672 on BOTTOM: 3.12,-11.4 4.39,-11.4 4.52,-11.53 4.52,-41 1.85,-43.66 -3.35,-43.66 -5.7,-41.31 -5.7,-26.58 -4.62,-25.5 1.98,-25.5 3.12,-24.36
N46056 on BOTTOM: 46.94,3.84 46.94,2.44 47.57,1.8 72.47,1.8 73.1,2.44 73.1,4.47 72.85,4.72 47.83,4.72
N46086 on BOTTOM: 61.54,-2.13 61.54,-4.04 61.8,-4.29 64.72,-4.29 65.74,-3.28 72.21,-3.28 72.97,-2.51 72.97,-0.74 72.59,-0.36 70.56,-0.36 69.67,-1.24 69.67,-1.88 61.8,-1.88
N46098 on BOTTOM: 61.42,10.31 61.42,8.66 62.31,7.77 70.05,7.77 71.07,6.76 72.34,6.76 73.1,7.52 73.1,9.04 72.34,9.8 63.96,9.8 63.32,10.44 61.54,10.44
N47294 on BOTTOM: 46.94,-69.44 46.94,-71.09 47.32,-71.48 72.59,-71.48 72.85,-71.22 72.85,-69.06 72.59,-68.81 47.57,-68.81
N47328 on BOTTOM: 61.16,-75.54 61.16,-77.06 61.67,-77.57 64.08,-77.57 64.97,-76.68 72.34,-76.68 72.85,-76.17 72.85,-74.4 72.34,-73.89 62.81,-73.89
N47344 on BOTTOM: 61.29,-63.09 64.34,-63.09 64.85,-63.6 71.96,-63.6 72.85,-64.49 72.85,-65.89 72.21,-66.52 69.8,-66.52 68.66,-65.38 61.54,-65.38 61.04,-64.87 61.04,-63.35
N47364 on BOTTOM: 46.94,-50.9 46.94,-53.06 47.83,-53.95 72.59,-53.95 73.36,-53.19 73.36,-51.92 72.09,-50.65 47.19,-50.65
N47376 on BOTTOM: 61.16,-57 61.16,-58.9 61.8,-59.54 64.47,-59.54 65.23,-58.78 72.59,-58.78 73.23,-58.14 73.23,-56.24 72.97,-55.98 62.18,-55.98
N47410 on BOTTOM: 61.29,-44.81 61.29,-46.58 63.45,-48.74 72.34,-48.74 73.36,-47.73 73.36,-46.2 72.47,-45.31 64.85,-45.31 64.34,-44.81
N47434 on BOTTOM: 47.19,-32.99 47.19,-34.9 47.57,-35.28 72.34,-35.28 72.97,-34.65 72.97,-32.87 72.47,-32.36 47.83,-32.36
N47472 on BOTTOM: 61.42,-39.34 61.42,-40.87 62.05,-41.5 64.21,-41.5 65.35,-40.36 72.47,-40.36 72.97,-39.85 72.97,-37.95 72.59,-37.57 70.56,-37.57 69.16,-38.96 61.8,-38.96
N47484 on BOTTOM: 61.04,-27.15 61.04,-28.3 62.05,-29.31 64.34,-29.31 64.59,-29.06 69.93,-29.06 71.07,-30.2 72.47,-30.2 72.97,-29.69 72.97,-28.04 72.47,-27.53 64.34,-27.53 63.7,-26.9 61.29,-26.9
N47508 on BOTTOM: 46.94,39.65 47.7,38.89 72.21,38.89 72.85,39.52 72.85,41.17 72.09,41.94 47.57,41.94 46.94,41.3
N47520 on BOTTOM: 61.04,35.2 61.04,33.55 61.67,32.92 63.96,32.92 64.85,33.81 72.09,33.81 72.85,34.57 72.85,36.35 72.59,36.6 69.29,36.6 68.28,35.59 61.42,35.59
N47550 on BOTTOM: 61.04,47.52 61.04,46 61.93,45.11 69.42,45.11 70.56,43.97 71.96,43.97 72.97,44.98 72.97,46.13 72.34,46.76 63.96,46.76 63.2,47.52
N47574 on BOTTOM: 46.81,22.63 46.81,20.98 47.32,20.47 72.59,20.47 73.1,20.98 73.1,22.38 72.34,23.14 47.32,23.14
N47604 on BOTTOM: 61.29,16.54 61.29,15.01 61.93,14.38 64.21,14.38 64.97,15.14 72.21,15.14 73.1,16.03 73.1,17.81 72.85,18.06 62.81,18.06
N47616 on BOTTOM: 61.42,28.85 61.42,27.58 62.31,26.7 69.8,26.7 71.07,25.43 72.59,25.43 72.97,25.81 72.97,27.71 72.59,28.09 64.34,28.09 63.32,29.11 61.67,29.11
N47728 on BOTTOM: 47.19,-14.07 47.19,-15.85 47.83,-16.48 72.34,-16.48 72.97,-15.85 72.97,-14.2 72.59,-13.82 47.45,-13.82
N47740 on BOTTOM: 61.04,-20.42 61.04,-21.95 61.67,-22.58 65.99,-22.58 67.01,-21.56 72.34,-21.56 73.1,-20.8 73.1,-19.02 72.72,-18.64 62.81,-18.64
N47770 on BOTTOM: 61.42,-8.23 61.42,-10.01 61.67,-10.26 69.8,-10.26 70.94,-11.4 72.34,-11.4 73.1,-10.64 73.1,-9.37 72.34,-8.61 64.08,-8.61 63.45,-7.98 61.67,-7.98
N72485 on BOTTOM: 37.67,7.77 37.67,5.87 40.59,2.95 45.42,2.95 45.54,3.07 45.54,4.98 45.29,5.23 43.26,5.23 43,4.98 40.08,4.98 39.32,5.74 39.32,7.65 39.19,7.77
N72769 on BOTTOM: 37.41,-10.77 37.41,-12.93 39.95,-15.47 45.42,-15.47 45.54,-15.34 45.54,-13.44 45.16,-13.06 43.13,-13.06 42.37,-13.82 39.83,-13.82 38.94,-12.93 38.94,-10.9 38.81,-10.77
N73065 on BOTTOM: 37.29,-29.57 38.68,-29.57 38.81,-29.69 38.81,-31.6 39.32,-32.11 42.88,-32.11 43.38,-31.6 45.29,-31.6 45.67,-31.98 45.67,-33.38 45.29,-33.76 39.45,-33.76 37.29,-31.6
N73365 on BOTTOM: 37.41,-47.35 37.41,-49.5 39.83,-51.92 45.03,-51.92 45.42,-51.54 45.42,-50.01 45.03,-49.63 42.88,-49.63 42.37,-50.14 42.37,-50.27 39.83,-50.27 39.07,-49.5 39.07,-47.35 38.94,-47.22 37.54,-47.22
N73669 on BOTTOM: 37.54,-64.62 38.94,-64.62 39.19,-64.87 39.19,-67.03 39.57,-67.41 45.16,-67.41 45.42,-67.67 45.42,-69.32 45.16,-69.57 40.34,-69.57 37.54,-66.78
N74990 on BOTTOM: 39.83,-64.74 39.83,-66.65 40.08,-66.9 41.86,-66.9 41.99,-66.78 41.99,-66.52 45.03,-66.52 45.42,-66.14 45.42,-64.62 45.16,-64.36 43.13,-64.36 42.75,-64.74
N76545 on BOTTOM: 40.34,-2.26 40.34,-4.42 41.86,-4.42 41.86,-2.64 42.62,-1.88 45.29,-1.88 45.54,-1.63 45.54,0.03 45.29,0.28 42.88,0.28
N76560 on BOTTOM: 39.7,-20.68 39.7,-22.83 40.08,-23.22 41.61,-23.22 41.73,-23.09 41.73,-21.18 42.24,-20.68 45.16,-20.68 45.54,-20.29 45.54,-18.64 45.29,-18.39 41.99,-18.39
N76587 on BOTTOM: 39.7,-39.6 39.7,-41.63 39.83,-41.76 41.35,-41.76 41.48,-41.63 41.48,-39.98 42.24,-39.22 45.29,-39.22 45.54,-38.96 45.54,-37.31 45.16,-36.93 43.26,-36.93 43,-37.19 43,-38.2 42.75,-38.46 41.86,-38.46 40.72,-39.6
N76621 on BOTTOM: 39.95,-57.38 39.95,-59.41 40.21,-59.66 41.73,-59.66 41.86,-59.54 41.86,-57.63 42.49,-57 45.16,-57 45.42,-56.74 45.42,-54.97 45.29,-54.84 42.49,-54.84
N76655 on BOTTOM: 39.95,-74.78 39.95,-76.68 40.21,-76.94 41.61,-76.94 41.73,-76.81 41.73,-75.03 42.24,-74.52 45.29,-74.52 45.42,-74.4 45.42,-72.49 45.16,-72.24 43.13,-72.24 40.59,-74.78
N87792 on BOTTOM: 40.34,7.77 43.13,7.77 43.26,7.9 45.42,7.9 45.54,7.77 45.54,5.87 45.42,5.74 42.11,5.74 41.99,5.61 40.46,5.61 40.34,5.74
N88579 on BOTTOM: 39.83,-10.9 39.83,-12.93 39.95,-13.06 41.73,-13.06 42.62,-12.17 45.42,-12.17 45.54,-12.04 45.54,-10.26 45.29,-10.01 42.88,-10.01 41.99,-10.9
N89000 on BOTTOM: 39.7,-29.57 42.88,-29.57 43.13,-29.31 43.13,-28.68 45.42,-28.68 45.54,-28.8 45.54,-30.58 45.29,-30.84 42.11,-30.84 41.22,-31.72 39.83,-31.72 39.7,-31.6
N89401 on BOTTOM: 39.95,-47.35 39.95,-49.38 40.08,-49.5 41.61,-49.5 42.11,-49 44.91,-49 45.42,-48.49 45.42,-47.35 44.78,-46.71 42.88,-46.71 42.24,-47.35
N90793 on BOTTOM: 37.54,26.06 39.07,26.06 39.07,24.03 39.83,23.27 42.62,23.27 43.51,24.16 45.42,24.16 45.67,23.9 45.67,22.25 45.42,22 43.38,22 42.88,22.5 39.07,22.5 37.54,24.03
N91085 on BOTTOM: 39.83,26.06 39.83,24.03 39.95,23.9 41.73,23.9 41.73,24.79 41.86,24.92 45.54,24.92 45.67,25.04 45.67,26.82 45.42,27.08 43.13,27.08 42.11,26.06
N91216 on BOTTOM: 43.13,18.95 43.13,16.92 42.37,16.15 40.21,16.15 39.95,15.9 39.95,14 40.08,13.87 41.61,13.87 41.73,14 41.73,15.39 41.86,15.52 42.24,15.52 43.51,16.79 45.54,16.79 45.67,16.92 45.67,18.95
N91679 on BOTTOM: 37.03,44.73 37.16,44.73 37.29,44.86 38.81,44.86 38.94,44.73 38.94,42.7 39.7,41.94 42.24,41.94 42.88,42.57 45.29,42.57 45.29,40.41 45.16,40.28 39.57,40.28 37.03,42.82
N91683 on BOTTOM: 39.57,44.86 39.57,42.57 39.83,42.32 41.35,42.32 42.49,43.46 44.91,43.46 45.16,43.71 45.16,45.36 45.03,45.49 42.49,45.49 41.86,44.86
N91836 on BOTTOM: 39.7,34.57 39.7,32.66 39.83,32.54 41.35,32.54 41.48,32.66 41.48,34.19 42.11,34.82 44.91,34.82 45.29,35.2 45.29,36.73 44.91,37.11 42.24,37.11
N478560 on BOTTOM: 21.41,-15.21 27.38,-15.21 27.51,-15.34 27.51,-17.25 27.38,-17.37 21.54,-17.37 21.41,-17.25
